# EAGLE board 8MIC_ximpedance_J007901D (EAGLE 7.7.0)
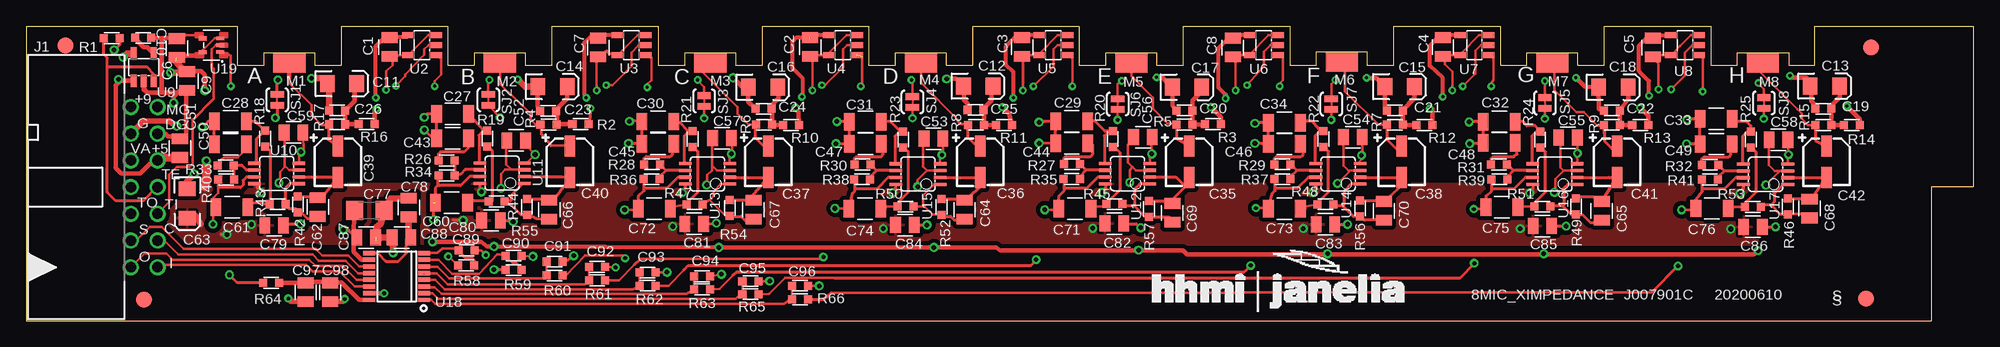
[diagram p0: board, top side]
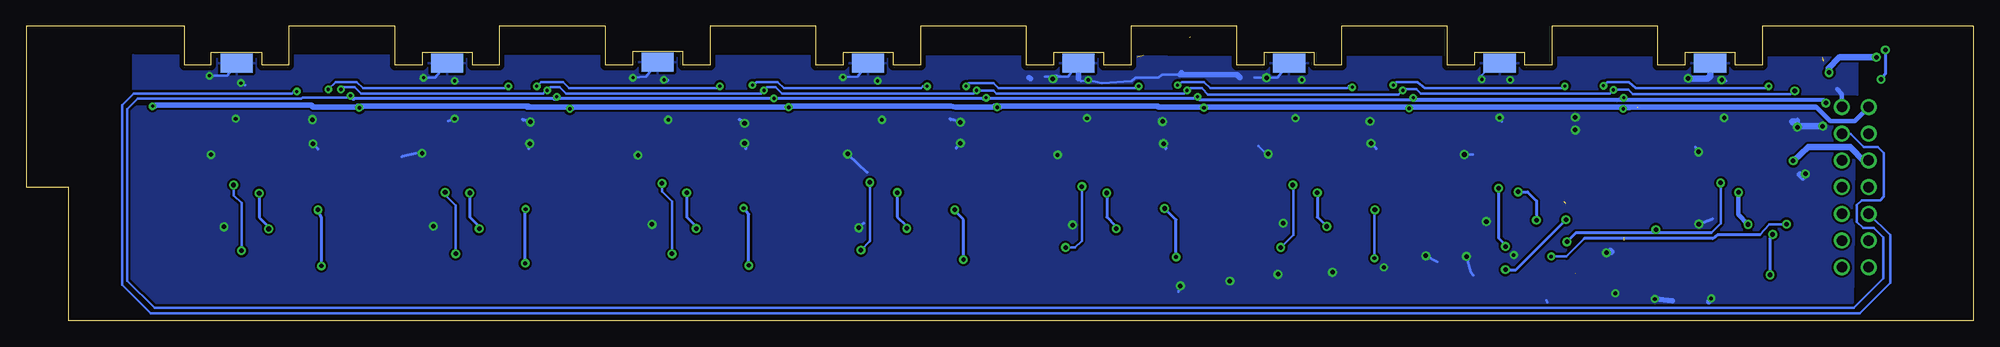
[diagram p1: board, bottom side, seen from below]

Size 185 x 28 mm. Coordinates in mm from the lower left corner, seen from the top.
Outline: 70 segments
Copper layers (1*16): Top 0.035mm / dielectric 1.5mm / Bottom 0.035mm
Design rules "default *": minimum track width 8mil, minimum drill 11mil, track to track 8mil, track to pad 8mil, pad to pad 8mil, via to via 8mil, smd to smd 8mil, copper to edge 20mil, drill to drill 8mil, minimum pad ring 10mil, minimum via ring 8mil, stop-mask expansion 4mil, vias tented up to drill 17mil, thermal gap 10mil

## Footprints (pad centres in the part's own frame; a part is rotated, then mirrored left to right if it is on the bottom)
0805S = smd 1.016 x 1.524: 1 -0.889,0; 2 0.889,0
0603S = smd 0.762 x 0.762: 1 -0.762,0; 2 0.762,0
EIA3216 = smd 1.4 x 1.6: A 1.4,0; C -1.4,0
1206S = smd 1.016 x 1.651: 1 -1.524,0; 2 1.524,0
CAP_ELEC_A = smd 1 x 2: M 0,-1.5; P 0,1.5
C1206 = smd 1.6 x 1.8: 1 -1.4,0; 2 1.4,0
PAK100/2500-5-14 = drill 1 pad 1.422: 1 -7.62,-1.27; 2 -7.62,1.27; 3 -5.08,-1.27; 4 -5.08,1.27; 5 -2.54,-1.27; 6 -2.54,1.27; 7 0,-1.27; 8 0,1.27; 9 2.54,-1.27; 10 2.54,1.27; 11 5.08,-1.27; 12 5.08,1.27; 13 7.62,-1.27; 14 7.62,1.27
FIDUCIAL-1.5X3 = smd 1.5 x 1.5: 1 0,0
CUI_EDGE = smd 3.048 x 1.778: + 0,-1.016 | smd 3.048 x 1.778 bottom: - 0,-1.016
SJ_2S-TRACE = smd 0.635 x 1.27: 1 -0.508,0; 2 0.508,0
SOT23-5 = smd 0.55 x 1.2: 1 -0.95,-1.3; 2 0,-1.3; 3 0.95,-1.3; 4 0.95,1.3; 5 -0.95,1.3
MSOP08 = smd 0.3 x 1.2: 1 -0.976,-2.113; 2 -0.326,-2.113; 3 0.324,-2.113; 4 0.974,-2.113; 5 0.974,2.112; 6 0.324,2.112; 7 -0.326,2.112; 8 -0.976,2.112
SSOP16 = smd 0.419 x 1.143: 1 -2.223,-2.6; 2 -1.587,-2.6; 3 -0.953,-2.6; 4 -0.318,-2.6; 5 0.318,-2.6; 6 0.953,-2.6; 7 1.587,-2.6; 8 2.223,-2.6; 9 2.223,2.6; 10 1.587,2.6; 11 0.953,2.6; 12 0.318,2.6; 13 -0.318,2.6; 14 -0.953,2.6; 15 -1.587,2.6; 16 -2.223,2.6
SOT-SC-5 = smd 0.35 x 0.75: 1 -0.65,-0.825; 3 0.65,-0.825 | smd 0.4 x 0.75: 2 0,-0.825; 4 0.65,0.825; 5 -0.65,0.825

## Placement (x,y rotation side)
C1  0.1  [0805S]  34.51,26.02 90 top
C2  0.1  [0805S]  74.49,26.02 90 top
C3  0.1  [0805S]  94.62,26.02 90 top
C4  0.1  [0805S]  134.61,26.02 90 top
C5  0.1  [0805S]  154.54,25.97 90 top
C6  0.1  [0805S]  14.31,25.92 90 top
C7  0.1  [0805S]  54.34,25.97 90 top
C8  0.1  [0805S]  114.64,25.97 90 top
C9  10  [0805S]  15.3,22.8 270 top
C10  0.01 NPO  [0603S]  11.1,26.9 0 top
C11  47  [EIA3216]  30,22.55 0 top
C12  47  [EIA3216]  90.45,22.3 0 top
C13  47  [EIA3216]  170.9,22.3 0 top
C14  47  [EIA3216]  50,22.25 0 top
C15  47  [EIA3216]  130.5,22.25 0 top
C16  47  [EIA3216]  70,22.2 0 top
C17  47  [EIA3216]  110.3,22.2 0 top
C18  47  [EIA3216]  150.8,22.2 0 top
C19  0.01 NPO  [0603S]  170.75,20.15 180 top
C20  0.01 NPO  [0603S]  110.05,20 180 top
C21  0.01 NPO  [0603S]  130.05,20 180 top
C22  0.01 NPO  [0603S]  150.65,20 180 top
C23  0.01 NPO  [0603S]  49.6,19.95 180 top
C24  0.01 NPO  [0603S]  70.05,20.15 180 top
C25  0.01 NPO  [0603S]  90.2,20.05 180 top
C26  0.01 NPO  [0603S]  29.55,20 180 top
C27  1200pF  [1206S]  40.51,19.65 0 top
C28  1200pF  [1206S]  19.4,18.97 0 top
C29  1200pF  [1206S]  99.34,18.95 0 top
C30  1200pF  [1206S]  60.02,18.93 0 top
C31  1200pF  [1206S]  79.73,18.91 0 top
C32  1200pF  [1206S]  139.96,18.91 0 top
C33  1200pF  [1206S]  160.57,19.19 0 top
C34  1200pF  [1206S]  119.55,18.83 0 top
C35  10  [CAP_ELEC_A]  110.5,15.1 0 top
C36  10  [CAP_ELEC_A]  90.65,15.1 0 top
C37  10  [CAP_ELEC_A]  70.5,15.1 0 top
C38  10  [CAP_ELEC_A]  130.7,15.1 0 top
C39  10  [CAP_ELEC_A]  29.6,15.1 0 top
C40  10uF  [CAP_ELEC_A]  51.65,15.1 0 top
C41  10  [CAP_ELEC_A]  151.15,15.1 0 top
C42  10  [CAP_ELEC_A]  171.05,15.1 0 top
C43  0.22  [1206S]  40.51,17.35 0 top
C44  0.22  [1206S]  99.34,16.85 0 top
C45  0.22  [1206S]  60.02,16.83 0 top
C46  0.22  [1206S]  119.55,16.83 0 top
C47  0.22  [1206S]  79.73,16.81 0 top
C48  0.22  [1206S]  139.96,16.91 0 top
C49  0.22  [1206S]  160.57,16.79 0 top
C50  0.22  [1206S]  19.4,16.77 0 top
C51  10  [0805S]  14.6,16.4 90 top
C52  0.047  [0805S]  46.55,17.15 180 top
C53  0.047  [0805S]  86.2,17.3 180 top
C54  0.047  [0805S]  126.05,17.45 180 top
C55  0.047  [0805S]  146.5,17.4 180 top
C56  0.047  [0805S]  106.1,17.45 180 top
C57  0.047  [0805S]  66.1,17.35 180 top
C58  0.047  [0805S]  166.5,17.2 180 top
C59  0.047  [0805S]  25.4,17.9 180 top
C60  1200pF  [1206S]  40.41,11.23 0 top
C61  1200pF  [1206S]  19.55,10.8 0 top
C62  330p NPO  [0805S]  27.7,10.8 90 top
C63  47  [EIA3216]  15.3,11.15 270 top
C64  330p NPO  [0805S]  89.15,10.55 90 top
C65  330p NPO  [0805S]  149.7,10.45 90 top
C66  330p NPO  [0805S]  49.7,10.55 90 top
C67  330p NPO  [0805S]  69.1,10.55 90 top
C68  330p NPO  [0805S]  169.45,10.65 90 top
C69  330p NPO  [0805S]  108.9,10.25 90 top
C70  330p NPO  [0805S]  129,10.45 90 top
C71  1200pF  [1206S]  99.64,10.63 0 top
C72  1200pF  [1206S]  59.67,10.66 0 top
C73  1200pF  [1206S]  119.55,10.66 0 top
C74  1200pF  [1206S]  79.68,10.64 0 top
C75  1200pF  [1206S]  140.21,10.79 0 top
C76  1200pF  [1206S]  160.17,10.67 0 top
C77  0.22  [C1206]  32.6,10.5 0 top
C78  10  [0805S]  36.35,10.75 90 top
C79  0.047  [0805S]  23.55,9.05 180 top
C80  0.047  [0805S]  44.16,9.53 180 top
C81  0.047  [0805S]  63.47,9.21 180 top
C82  0.047  [0805S]  103.39,9.23 180 top
C83  0.047  [0805S]  123.45,9.16 180 top
C84  0.047  [0805S]  83.48,9.09 180 top
C85  0.047  [0805S]  144.06,8.99 180 top
C86  0.047  [0805S]  164.07,8.92 180 top
C87  0.1  [0805S]  32.3,7.9 0 top
C88  0.1  [0805S]  35.65,7.9 180 top
C89  DNI  [0603S]  41.84,6.68 0 top
C90  DNI  [0603S]  46.3,6.17 0 top
C91  DNI  [0603S]  50.18,5.61 0 top
C92  DNI  [0603S]  54.23,5.1 0 top
C93  DNI  [0603S]  59.05,4.57 0 top
C94  DNI  [0603S]  64.2,4.21 0 top
C95  DNI  [0603S]  68.8,3.76 0 top
C96  DNI  [0603S]  73.51,3.32 0 top
C97  10  [0805S]  26.55,2.7 270 top
C98  0.1  [0805S]  28.88,2.7 270 top
J1  2514-5  [PAK100/2500-5-14]  11.2,12.7 90 top
JP1  FIDUCIAL1.5X3  [FIDUCIAL-1.5X3]  11.2,2 0 top
JP2  FIDUCIAL1.5X3  [FIDUCIAL-1.5X3]  174.8,2.1 0 top
JP3  FIDUCIAL1.5X3  [FIDUCIAL-1.5X3]  3.7,26.2 0 top
JP4  FIDUCIAL1.5X3  [FIDUCIAL-1.5X3]  175.3,26 0 top
M1  MIC-CUI  [CUI_EDGE]  25,25.5 0 top
M2  MIC-CUI  [CUI_EDGE]  45,25.5 0 top
M3  MIC-CUI  [CUI_EDGE]  65,25.5 0 top
M4  MIC-CUI  [CUI_EDGE]  85,25.5 0 top
M5  MIC-CUI  [CUI_EDGE]  105,25.5 0 top
M6  MIC-CUI  [CUI_EDGE]  125,25.6 0 top
M7  MIC-CUI  [CUI_EDGE]  145,25.5 0 top
M8  MIC-CUI  [CUI_EDGE]  165,25.5 0 top
R1  49K9  [0603S]  8.1,26.87 180 top
R2  499  [0603S]  52.65,18.7 0 top
R3  499  [0603S]  112.75,18.7 0 top
R4  4K02  [0603S]  49.61,18.65 0 top
R5  4K02  [0603S]  110.04,18.65 0 top
R6  4K02  [0603S]  70.12,18.63 0 top
R7  4K02  [0603S]  130.05,18.63 0 top
R8  4K02  [0603S]  90.23,18.61 0 top
R9  4K02  [0603S]  150.66,18.61 0 top
R10  499  [0603S]  72.65,18.6 0 top
R11  499  [0603S]  92.9,18.6 0 top
R12  499  [0603S]  132.85,18.6 0 top
R13  499  [0603S]  153.35,18.6 0 top
R14  499  [0603S]  173.45,18.6 0 top
R15  4K02  [0603S]  170.77,18.59 0 top
R16  499  [0603S]  32.35,18.7 0 top
R17  4K02  [0603S]  29.55,18.67 0 top
R18  49K9  [0603S]  22.7,17.3 270 top
R19  49K9  [0603S]  43.81,17.33 270 top
R20  49K9  [0603S]  103.24,17.28 270 top
R21  49K9  [0603S]  63.32,17.26 270 top
R22  49K9  [0603S]  123.25,17.26 270 top
R23  49K9  [0603S]  83.33,17.24 270 top
R24  49K9  [0603S]  143.86,17.24 270 top
R25  49K9  [0603S]  163.87,17.22 270 top
R26  49K9  [0603S]  39.95,15.23 180 top
R27  49K9  [0603S]  99.37,14.88 180 top
R28  49K9  [0603S]  59.45,14.86 180 top
R29  49K9  [0603S]  119.38,14.86 180 top
R30  49K9  [0603S]  79.46,14.84 180 top
R31  49K9  [0603S]  139.94,14.84 180 top
R32  49K9  [0603S]  160,14.82 180 top
R33  49K9  [0603S]  18.96,14.75 180 top
R34  29K4  [0603S]  39.95,13.8 0 top
R35  29K4  [0603S]  99.34,13.48 0 top
R36  29K4  [0603S]  59.42,13.46 0 top
R37  29K4  [0603S]  119.35,13.46 0 top
R38  29K4  [0603S]  79.43,13.44 0 top
R39  29K4  [0603S]  139.96,13.44 0 top
R40  29K4  [0603S]  18.98,13.43 0 top
R41  29K4  [0603S]  159.97,13.42 0 top
R42  133K  [0603S]  25.8,11.05 90 top
R43  49K9  [0603S]  23.9,11.07 0 top
R44  49K9  [0603S]  44.71,11.33 0 top
R45  49K9  [0603S]  103.39,11.08 0 top
R46  133K  [0603S]  167.38,10.87 90 top
R47  49K9  [0603S]  63.52,11.06 0 top
R48  49K9  [0603S]  123.45,11.06 0 top
R49  133K  [0603S]  147.26,10.86 90 top
R50  49K9  [0603S]  83.53,10.84 0 top
R51  49K9  [0603S]  144.06,10.84 0 top
R52  133K  [0603S]  86.96,10.83 90 top
R53  49K9  [0603S]  164.07,10.82 0 top
R54  133K  [0603S]  66.84,10.72 90 top
R55  133K  [0603S]  47.57,10.81 90 top
R56  133K  [0603S]  126.74,10.65 90 top
R57  133K  [0603S]  106.67,10.64 90 top
R58  0  [0603S]  41.8,5.25 180 top
R59  0  [0603S]  46.3,4.81 180 top
R60  0  [0603S]  50.18,4.29 0 top
R61  0  [0603S]  54.23,3.83 0 top
R62  0  [0603S]  59.05,3.33 0 top
R63  0  [0603S]  64.2,2.97 0 top
R64  10R0  [0603S]  23.25,3.6 180 top
R65  0  [0603S]  68.8,2.51 0 top
R66  0  [0603S]  73.51,2.02 0 top
SJ1  SOLDERJUMPERTRACE  [SJ_2S-TRACE]  23.85,21 90 top
SJ2  SOLDERJUMPERTRACE  [SJ_2S-TRACE]  43.9,21 270 top
SJ3  SOLDERJUMPERTRACE  [SJ_2S-TRACE]  64.4,20.9 270 top
SJ4  SOLDERJUMPERTRACE  [SJ_2S-TRACE]  84.2,20.8 270 top
SJ5  SOLDERJUMPERTRACE  [SJ_2S-TRACE]  144.3,20.7 270 top
SJ6  SOLDERJUMPERTRACE  [SJ_2S-TRACE]  103.7,20.6 270 top
SJ7  SOLDERJUMPERTRACE  [SJ_2S-TRACE]  124,20.6 270 top
SJ8  SOLDERJUMPERTRACE  [SJ_2S-TRACE]  165.1,20.7 270 top
U2  TMP05  [SOT23-5]  37.6,26.2 90 top
U3  TMP05  [SOT23-5]  57.5,26.2 90 top
U4  TMP05  [SOT23-5]  77.6,26.2 90 top
U5  TMP05  [SOT23-5]  97.6,26.2 90 top
U6  TMP05  [SOT23-5]  117.6,26.2 90 top
U7  TMP05  [SOT23-5]  137.6,26.2 90 top
U8  TMP05  [SOT23-5]  157.6,26.2 90 top
U9  LP3985  [SOT23-5]  11.15,24.1 0 top
U10  OPA2376  [MSOP08]  23.8,14 90 top
U11  OPA2376  [MSOP08]  45.21,14.03 90 top
U12  OPA2376  [MSOP08]  104.64,13.98 90 top
U13  OPA2376  [MSOP08]  64.72,13.96 90 top
U14  OPA2376  [MSOP08]  124.65,13.96 90 top
U15  OPA2376  [MSOP08]  84.73,13.94 90 top
U16  OPA2376  [MSOP08]  145.26,13.94 90 top
U17  OPA2376  [MSOP08]  165.27,13.92 90 top
U18  LTC1867L  [SSOP16]  35.2,4.2 90 top
U19  TMP05/06  [SOT-SC-5]  17.6,26.2 90 top
U$1  JFRC-LOGOLOGO_OP  [LOGO_BMP_OP]  117.14,2.29 0 top

## Library data of the parts
C1-C10 C19-C62 C64-C76 C78-C98 M1-M8 R1-R66 U19 U$1 = STEVES_BU
C11-C18 C63 JP1-JP4 SJ1-SJ8 = SparkFun
C77 = eagle-ltspice; SPICEMODEL: NONE; SPICEPREFIX: C
J1 = con-3m; MPN: N2514-5002RB; OC_FARNELL: 1788673; OC_NEWARK: 97K6709
U2-U8 = analog-devices_sws
U9 = jfrc
U10-U17 = burr-brown; MF: TEXAS INSTRUMENTS; MPN: OPA2237EA/250; OC_FARNELL: 1470365; OC_NEWARK: 35C1853
U18 = linear-technology

## Nets
1.25V: C52.2 C53.2 C54.2 C55.2 C56.2 C57.2 C58.2 C59.2 C77.1 C87.1 U10.3 U11.3 U12.3 U13.3 U14.3 U15.3 U16.3 U17.3 U18.10
2.5V: C78.1 C88.1 U18.9
!CS: J1.4 U18.11
+3V3D: C1.1 C2.1 C3.1 C4.1 C5.1 C6.1 C7.1 C8.1 C9.1 U2.3 U2.5 U3.3 U3.5 U4.3 U4.5 U5.3 U5.5 U6.3 U6.5 U7.3 U7.5 U8.3 U8.5 U9.5 U19.3 U19.5
+5VD: C51.1 J1.9 R1.1 U9.1
+VA: C63.A C79.2 C80.2 C81.2 C82.2 C83.2 C84.2 C85.2 C86.2 J1.10 R64.2 U10.8 U11.8 U12.8 U13.8 U14.8 U15.8 U16.8 U17.8
+VM: J1.14 R2.2 R3.2 R10.2 R11.2 R12.2 R13.2 R14.2 R16.2
CLK: J1.3 U18.12
DGND: C1.2 C2.2 C3.2 C4.2 C5.2 C6.2 C7.2 C8.2 C9.2 C10.2 C51.2 J1.11 U2.4 U3.4 U4.4 U5.4 U6.4 U7.4 U8.4 U9.2 U19.4
GND: C27.1 C28.1 C29.1 C30.1 C31.1 C32.1 C33.1 C34.1 C43.1 C44.1 C45.1 C46.1 C47.1 C48.1 C49.1 C50.1 C52.1 C53.1 C54.1 C55.1 C56.1 C57.1 C58.1 C59.1 C63.C C77.2 C78.2 C79.1 C80.1 C81.1 C82.1 C83.1 C84.1 C85.1 C86.1 C87.2 C88.2 C89.2 C90.2 C91.2 C92.2 C93.2 C94.2 C95.2 C96.2 C97.2 C98.2 J1.12 SJ1.1 SJ2.2 SJ3.2 SJ4.2 SJ5.2 SJ6.2 SJ7.2 SJ8.2 U10.4 U11.4 U12.4 U13.4 U14.4 U15.4 U16.4 U17.4 U18.15
M1: C61.1 R40.1 R58.2 U10.7
M2: C60.1 R34.1 R59.2 U11.7
M3: C72.1 R36.1 R60.2 U13.7
M4: C74.1 R38.1 R61.2 U15.7
M5: C71.1 R35.1 R62.2 U12.7
M6: C73.1 R37.1 R63.2 U14.7
M7: C75.1 R39.1 R65.2 U16.7
M8: C76.1 R41.1 R66.2 U17.7
MGND: C11.C C12.C C13.C C14.C C15.C C16.C C17.C C18.C C19.2 C20.2 C21.2 C22.2 C23.2 C24.2 C25.2 C26.2 J1.13 M1.- M2.- M3.- M4.- M5.- M6.- M7.- M8.- SJ1.2 SJ2.1 SJ3.1 SJ4.1 SJ5.1 SJ6.1 SJ7.1 SJ8.1
MIC4: C36.P M4.+ R8.1
MISO: J1.2 U18.13
MOSI: J1.1 U18.14
N$1: C39.P M1.+ R17.1
N$2: C39.M C62.2 R42.2 U10.2
N$3: C40.P M2.+ R4.1
N$4: C14.A C23.1 R2.1 R4.2
N$5: C40.M C66.2 R55.2 U11.2
N$6: C62.1 R42.1 R43.2 U10.1
N$7: C11.A C26.1 R16.1 R17.2
N$8: C16.A C24.1 R6.2 R10.1
N$9: C61.2 R18.2 R43.1
N$10: C28.2 R18.1 U10.5
N$11: C17.A C20.1 R3.1 R5.2
N$12: C50.2 R33.2
N$13: R33.1 R40.2 U10.6
N$14: C66.1 R44.2 R55.1 U11.1
N$15: C60.2 R19.2 R44.1
N$16: C27.2 R19.1 U11.5
N$17: C43.2 R26.2
N$18: R26.1 R34.2 U11.6
N$19: C37.P M3.+ R6.1
N$20: C12.A C25.1 R8.2 R11.1
N$21: C37.M C67.2 R54.2 U13.2
N$23: C67.1 R47.2 R54.1 U13.1
N$24: C72.2 R21.2 R47.1
N$25: C30.2 R21.1 U13.5
N$26: C45.2 R28.2
N$27: R28.1 R36.2 U13.6
N$28: C15.A C21.1 R7.2 R12.1
N$29: C18.A C22.1 R9.2 R13.1
N$30: C36.M C64.2 R52.2 U15.2
N$31: C13.A C19.1 R14.1 R15.2
N$32: C64.1 R50.2 R52.1 U15.1
N$33: C74.2 R23.2 R50.1
N$34: C31.2 R23.1 U15.5
N$35: C47.2 R30.2
N$36: R30.1 R38.2 U15.6
N$39: C35.M C69.2 R57.2 U12.2
N$41: C69.1 R45.2 R57.1 U12.1
N$42: C71.2 R20.2 R45.1
N$43: C29.2 R20.1 U12.5
N$44: C44.2 R27.2
N$45: R27.1 R35.2 U12.6
N$46: C38.P M6.+ R7.1
N$48: C38.M C70.2 R56.2 U14.2
N$50: C70.1 R48.2 R56.1 U14.1
N$51: C73.2 R22.2 R48.1
N$52: C34.2 R22.1 U14.5
N$53: C46.2 R29.2
N$54: R29.1 R37.2 U14.6
N$55: C41.P M7.+ R9.1
N$57: C41.M C65.2 R49.2 U16.2
N$59: C65.1 R49.1 R51.2 U16.1
N$60: C75.2 R24.2 R51.1
N$61: C32.2 R24.1 U16.5
N$62: C48.2 R31.2
N$63: R31.1 R39.2 U16.6
N$64: C42.P M8.+ R15.1
N$66: C42.M C68.2 R46.2 U17.2
N$68: C68.1 R46.1 R53.2 U17.1
N$69: C76.2 R25.2 R53.1
N$70: C33.2 R25.1 U17.5
N$71: C49.2 R32.2
N$72: R32.1 R41.2 U17.6
N$75: U2.2 U19.1
N$76: U2.1 U3.2
N$77: U3.1 U4.2
N$78: U4.1 U5.2
N$79: U5.1 U6.2
N$80: U6.1 U7.2
N$81: U7.1 U8.2
N$84: C10.1 U9.4
N$90: C35.P M5.+ R5.1
OUT1: C89.1 R58.1 U18.8
OUT2: C90.1 R59.1 U18.7
OUT3: C91.1 R60.1 U18.6
OUT4: C92.1 R61.1 U18.5
OUT5: C93.1 R62.1 U18.4
OUT6: C94.1 R63.1 U18.3
OUT7: C95.1 R65.1 U18.2
OUT8: C96.1 R66.1 U18.1
TEN: J1.7 R1.2 U9.3
TMI: J1.5 U19.2
TMO: J1.6 U8.1
VADC: C97.1 C98.1 R64.1 U18.16

## Tracks (layer width: path | path; a pad name or v marks a point on that pad's centre or on a via)
1.25V  (via drill 0.43)
  Top 0.254: U10.3 24.98,14.32 24.55,14.75 | 24.55,14.75 24.55,17.19 C59.2 | 24.55,14.75 24.55,14.6 24.1,14.15 24.1,13.2 v24,13.1 | C52.2 45.6,17.24 45.6,14.85 46.1,14.35 U11.3 45.5,14.35 45.1,13.95 v45.1,12.6 | U13.3 65.62,14.28 65.15,14.75 | 65.15,14.75 65.15,17.59 C57.2 | 65.15,14.75 65.15,14.3 64.7,13.85 64.7,12.95 v64.65,12.9 | U15.3 85.59,14.26 | 85.59,14.26 85.2,14.65 85.2,17.29 C53.2 | v84.7,12.75 84.7,13.38 85.59,14.26 | C56.2 105.26,17.31 104.7,16.75 104.7,15.05 105.12,14.62 | 105.12,14.62 105.45,14.3 U12.3 | v104.85,13.15 104.85,14.35 105.12,14.62 | C54.2 125.16,14.74 125.65,14.3 126.75,14.3 U14.3 125.83,14.28 v124.6,13.05 | v123.65,6.35 123.65,6.3 | C55.2 145.75,18.06 145.75,14.55 146.04,14.26 U16.3 146.11,14.26 145.3,13.45 145.3,12.3 v145.2,12.2 | v144.2,6.35 144.15,6.3 | C58.2 165.6,17.59 165.6,14.8 166.16,14.24 U17.3 166.64,14.24 v165.3,12.9 | v164.55,6.65 164.15,6.3
  Top 0.305: C87.1 30.65,8.6 v30.15,8.65 | 151.3,6.3 151.35,6.3
  Top 0.406: 151.3,6.3 144.15,6.3 123.65,6.3 110.3,6.3 109.9,6.7 v105.69,6.7 92.5,6.7 92.15,6.95 v86.25,6.95 v65.8,6.95 v44.45,7.05 43.8,7.05 43.2,7.5 v38.6,7.5 | 151.35,6.3 164.15,6.3 164.6,6.75 | U18.10 31.86,5.79 31.1,6.55 31.1,7.89 C87.1 31.11,8.75 C77.1
  Bottom 0.254: v24,13.1 24,9.25 24.9,8.35 | v45.1,12.6 44.95,12.6 | v64.65,12.9 64.6,12.9 64.6,8.15 v65.8,6.95 | v105.69,6.7 104.89,7.54 104.85,7.6 v104.85,13.15 | v86.25,6.95 85.35,6.95 84.7,7.6 v84.7,12.75 | v124.6,13.05 124.6,12.3 123.65,11.35 v123.65,6.35 | v145.2,12.2 145.2,11.95 144.2,10.95 v144.2,6.35 | v165.3,12.9 165.3,11.9 164.55,11.2 v164.55,6.65
  Bottom 0.305: v44.45,7.05 44.45,7.2 45.05,7.8 45.05,12.55 v45.1,12.6 | 24.9,8.35 30.15,8.35 | 30.15,8.35 37.75,8.35 v38.6,7.5 | v30.15,8.65 30.15,8.35
2.5V
  Top 0.305: U18.9 33.38,6.42 34.15,5.65 35.35,5.65 36.1,6.4 36.15,7.81 C88.1
  Top 0.406: 36.3,7.81 C88.1
  Top 0.61: C78.1 36.35,8.01 C88.1
!CS
  Top 0.254: U18.11 31.65,5.15 30.6,6.2 28.1,6.2 27.5,6.8 14.95,6.8 12.85,8.9 11.71,8.9 10.5,7.7 10.4,7.62 J1.4
+3V3D  (via drill 0.3, 0.43)  (1 unrouted)
  Top 0.25: v54.2,21.9 54.2,24.7 54.54,25.06 C7.1 55.14,25.66 55.4,25.4 56.15,25.4 U3.5 58.1,27.15 U3.3 | v34.19,21.94 34.19,23.71 34.8,24.3 34.8,25.1 34.9,25.5 C1.1 | v74.7,21.9 74.7,24.55 74.65,25.2 C2.1 75.1,25.25 U4.5 76.25,25.45 77.95,27.15 U4.3 | v94.7,21.9 94.7,25.24 C3.1 95.03,25.25 U5.5 96.3,25.45 98,27.15 U5.3 | v114.9,21.9 114.9,24.6 115,24.8 114.85,25.32 C8.1 114.95,25.25 U6.5 116.3,25.4 118.05,27.15 U6.3 | v135.5,21.9 135.5,23.7 134.8,24.4 134.8,25.5 C4.1 135.37,25.25 U7.5 136.35,25.45 138.05,27.15 U7.3 | v155.1,22 155.1,24.5 155,24.6 154.8,25.3 C5.1 155.4,25.25 U8.5 157.1,26.1 158.15,27.15 U8.3
  Top 0.254: C1.1 35.29,25.21 U2.5 38.2,27.15 U2.3 | U19.3 17.9,26.85 16.77,25.73 U19.5 16.55,25.55 16.22,25.23
  Top 0.305: 15.9,23.8 14.99,23.8 C9.1
  Top 0.406: 16.1,25.25 16.22,25.23 14.51,25.23 C6.1 | 14.99,23.8 14.99,23.94 | v16.95,21.85 16.95,23.4 16.6,23.75 15.61,23.75 C9.1 15.09,23.9
  Top 0.61: 15.09,23.9 15,23.9 14.93,23.82 | 14.93,23.82 14.2,24.7 | U9.5 9.55,25.4 v9.2,25.05 | v13.7,23.6 14.65,23.6 14.93,23.82
  Bottom 0.25: v34.19,21.94 34.53,21.6 52.5,21.6 52.9,22 54,22 v54.2,21.9 54.6,21.5 72.7,21.5 73.3,22.1 74.4,22.1 v74.7,21.9 75,21.6 92.8,21.6 93.1,21.9 v94.7,21.9 95,21.6 113.2,21.6 113.8,22.2 114.6,22.2 v114.9,21.9 115.2,21.6 133.7,21.6 134.3,22.2 135.2,22.2 135.5,22 | 135.5,22 135.7,21.9 | 135.5,22 135.7,22 135.44,21.95 | 135.44,21.95 v135.5,21.9 | 135.44,21.95 135.54,21.95 135.9,21.6 153.2,21.6 153.8,22.2 154.9,22.2 v155.1,22
  Bottom 0.254: v34.19,21.94 33.95,21.98 32.78,21.98 32.34,21.54 17.36,21.54 v16.95,21.85
  Bottom 0.61: v9.2,25.05 12.65,25.05 12.75,25 13.7,24 v13.7,23.6
+5VD  (via drill 0.43)
  Top 0.305: R1.1 8.86,26.26 v8.35,25.75 | v8.75,22.95 8.95,22.85
  Top 0.406: J1.9 12.04,15.24 10.8,14 9,14 8.5,14.5 8.5,22.4 8.95,22.85 10.15,22.85 U9.1
  Top 0.61: 10.15,22.75 U9.1
  Top 0.813: J1.9 12.78,15.49 C51.1
  Bottom 0.305: v8.35,25.75 8.35,23.45 v8.75,22.95
+VA  (via drill 0.43)
  Top 0.305: U13.8 62.61,12.65 v62.32,12.16 | v61.42,8.96 61.42,9.06 | U15.8 82.62,12.63 v82.33,12.14 | v81.43,8.74 81.43,9.14 | U17.8 163.16,12.61 v162.87,12.12 | v161.97,8.72 161.97,9.02 | U16.8 143.15,12.63 v142.86,12.14 | v141.96,8.74 141.96,9.04 | U14.8 122.54,12.65 v122.25,12.16 | v121.35,8.76 121.35,9.06 | U12.8 102.53,12.67 v102.24,12.18 | v101.34,8.78 101.34,9.08 | U10.8 21.99,12.91 | U11.8 43.1,12.55 v43.25,12.25 | v41.5,9.55 40.7,9.55 40.55,9.6 | R64.2 20.05,3.6 v19.3,4.35 | v19.05,8.2 18.55,8.15 18.5,8.2
  Top 0.406: 21.99,12.91 22,12.9 21.99,12.69 v22.3,12.2
  Top 0.61: 16.05,10 16.55,9.2
  Top 0.813: v17.1,15.2 17.1,13 16.95,12.7
  Bottom 0.305: v62.32,12.16 62.32,9.86 61.52,9.06 61.52,8.86 v61.42,8.96 | v82.33,12.14 82.33,9.84 81.53,9.04 81.53,8.84 v81.43,8.74 | v162.87,12.12 162.87,9.82 162.07,9.02 162.07,8.82 v161.97,8.72 | v142.86,12.14 142.86,9.84 142.06,9.04 142.06,8.84 v141.96,8.74 | v122.25,12.16 122.25,9.86 121.45,9.06 121.45,8.86 v121.35,8.76 | v102.24,12.18 102.24,9.88 101.44,9.08 101.44,8.88 v101.34,8.78 | v43.25,12.25 42.35,12.25 41.5,11.4 v41.5,9.55 | v19.3,4.35 19.3,7.8 v19.05,8.2
  Bottom 0.406: v22.3,12.2 22.3,10.1 v21.4,9.15
  Bottom 0.61: v17.1,15.2 15.65,16.51 11.69,16.51 10.35,15.15 10.35,15.24 J1.10
  pour Top (isolate 0.4): -0.83,13 164.55,13 164.55,7.2 -0.75,7.35
+VM  (via drill 0.3, 0.35)  (1 unrouted)
  Top 0.25: v173,20.4 172.95,20.45 173.05,20.45
  Top 0.254: 92.79,20.46 v92.75,20.3 | 112.45,20.15 v112.55,20.3 | 133.27,19.98 v133.35,20.15 | 153.29,20.16 v153.35,20.25 | 73.07,20.08 v73.1,20.25
  Top 0.305: R2.2 53.61,19.41 v53.6,20.2
  Top 0.406: R16.2 33.1,19.8 33.1,20 33.09,19.96 v33.25,20.15 | 73.07,20.08 73.37,19.84 R10.2 | R11.2 93.36,19.69 v92.75,20.3 | R3.2 113.51,19.34 v112.55,20.3 | R12.2 133.61,20.11 v133.35,20.15 | R13.2 154.11,19.49 v153.35,20.25 | R14.2 174.21,19.19 v173,20.4
  Bottom 0.25: 31.9,20.3 35.3,20.3 | 51.7,20.3 51.7,20.2 v53.6,20.2 | 58.3,20.3 56.9,20.3
  Bottom 0.254: 118.2,20.3 122.1,20.4 | v92.75,20.3 92.65,20.4 | v112.55,20.3 112.35,20.35 | v153.35,20.25 153.3,20.3 | v73.1,20.25 73.1,20.1
  Bottom 0.406: 10.28,20.42 J1.14 11.25,19 13.6,19 14.95,20.35 15,20.3 | v33.25,20.15 31.9,20.25 31.7,20.25
  Bottom 0.5: v173,20.4 172.8,20.4 172.7,20.5 157.95,20.5 157.75,20.3 153.4,20.3 | 153.1,20.3 153.3,20.3 153.4,20.3 | 153.4,20.3 153.5,20.4 137.3,20.4 137.2,20.3 | 137.4,20.3 137.2,20.3 | 137.2,20.3 133.5,20.3 | 133.5,20.3 118.2,20.3 v112.55,20.3 112.45,20.3 | v133.35,20.15 133.1,20.2 133.5,20.3 | 112.45,20.3 112.35,20.35 | 112.45,20.3 112.2,20.4 97.2,20.4 96.7,20.3 93.2,20.3 | 92.65,20.4 92.5,20.3 v92.75,20.3 93.2,20.3 | 93.2,20.3 93,20.4 92.65,20.4 | 92.65,20.4 77.5,20.4 77.4,20.3 73.1,20.3 | 73.1,20.3 v73.1,20.25 | 73.1,20.3 58.3,20.3 51.7,20.3 31.9,20.3 15,20.3
CLK
  Top 0.254: U18.12 31.53,4.52 30.35,5.7 27.8,5.7 27.2,6.3 14.45,6.3 13.15,7.6 12.44,7.6 J1.3
DGND  (via drill 0.3, 0.43)  (1 unrouted)
  Top 0.254: 14.65,27.15 16.48,27.15 U19.4
  Top 0.4: C2.2 75.08,27.18 75.8,27.2 76.25,27.2 U4.4 | v33.2,21.2 33.2,26.1 34.3,27.2 34.94,27.2 C1.2 35.08,26.98 35.4,27 36.15,27 U2.4 | v53.2,21.2 53.05,21.5 53.05,26.45 53.7,27.1 54.46,27.1 C7.2 54.91,27.15 U3.4 | v73.7,21.3 73.8,21.6 73.8,23 72.8,24 72.8,26.55 73.2,26.95 74.37,26.95 | v93.8,21.2 93.8,23.65 93.1,24.3 93.1,26.1 94.1,27.1 94.7,27.1 C3.2 94.98,27.15 U5.4 | v113.95,21.15 113.95,21.5 113.3,22.15 113.3,25.9 114.3,26.9 115.02,26.9 C8.2 115.31,27.15 U6.4 | v134.6,21.3 134.6,23.1 133.35,24.25 133.35,26.15 134.2,27 134.78,27 C4.2 135.12,27.15 U7.4 | v154.2,21.4 154.2,22.8 153.25,23.75 153.25,26.15 154.1,27 154.77,27 C5.2 155.01,27.1 156.2,27.1 U8.4
  Top 0.406: J1.11 13.22,17.78 13.5,17.5 14.39,17.5 C51.2 14.79,17.29 15.2,17.7 15.2,21.41 15.14,21.91 | 15.14,21.91 C9.2 | 15,22 15.14,21.91 | 14.65,27.15 C6.2 14.27,26.85 C10.2 13,26.85 12.85,26.8 12.85,21.75 13.2,21.7 | v14,20.7 14,21.3 14.55,21.85 14.75,21.85 | 14.75,21.85 15.1,21.85 15.15,21.9 | 13.2,21.7 11.5,21.7 11.15,22.05 U9.2 11.15,21.95 | 13.2,21.7 14.6,21.7 14.75,21.85
  Bottom 0.254: v154.2,21.4 154.5,21.2 158.75,21.2 158.9,21.1 174.4,21.1 175.4,20.1 175.4,3.8 172.8,1.2 11.35,1.2 8.55,4 8.55,7.9 9.45,8.8 10.45,8.8 11.05,9.4 11.05,11 10.6,11.45 8.85,11.45 8.5,11.8 8.5,15.95 9.05,16.5 10.4,16.5 11.65,17.75 12.44,17.75 J1.11
  Bottom 0.3: 53.2,21 73.5,21 73.7,21.1 94,21.1 114.1,21.1 134.8,21.1 153.9,21.1
  Bottom 0.4: 14.1,20.9 14.2,21 33.9,21 | 33.9,21 v33.2,21.2 | 33.9,21 53.2,21 v53.2,21.2 | 73.7,21.1 v73.7,21.3 | 94,21.1 v93.8,21.2 | 114.1,21.1 v113.95,21.15 | 134.8,21.1 v134.6,21.3 | 153.9,21.1 v154.2,21.4
  Bottom 0.406: 14.1,20.9 14.2,20.9 v14,20.7
GND  (via drill 0.36, 0.4, 0.43)  (1 unrouted)
  Top 0.25: SJ2.2 v45,19.3 | SJ3.2 v64.4,19.25 | SJ4.2 v84.2,19.25 | SJ8.2 v165.1,19.2 | SJ5.2 v144.3,19.2 | SJ7.2 v124,19.1 | SJ6.2 v103.7,19.1
  Top 0.254: 87.17,14.95 U15.4 86.84,15.83 v87.01,15.76 87.09,16.25 C53.1 | U14.4 127.09,14.92 126.5,14.95 126.88,15.33 v126.88,15.73 126.94,15.95 C54.1 | U16.4 147.35,16 v147.39,15.91 147.39,16.61 C55.1 | U17.4 167.36,15.73 v167.45,15.79 167.44,16.59 C58.1 | C92.2 v56.01,5.05 | C93.2 v60.88,4.59 60.83,4.32 | C94.2 v66.06,4.41 | C95.2 v70.64,3.76 | 74.51,3.32 C96.2 74.34,3.29 v75.33,3.29 | C89.2 43.22,6.68 43.3,6.6 v43.66,6.23 | C90.2 47.88,6.12 v48.15,6.1 | C91.2 51.31,5.61 v52.01,6.16 | U10.4 25.91,15.76 v26.1,16.05 26.34,16.01 C59.1 | C52.1 47.39,16.76 v48.35,15.8 47.55,15 U11.4 | U13.4 66.83,15.68 v67,15.85 67.09,15.94 C57.1 | C56.1 106.94,16.59 v106.95,15.85 106.75,15.8 U12.4 | 33.99,2.61 v34,2.6
  Top 0.305: C50.1 C28.1 17.28,18.95 v16.7,18.4 | C79.1 24.65,9.15 24.87,9.18 v26.07,9.18 | v37.81,19.33 38.09,19.65 C27.1 C43.1 38.78,17.2 v37.81,18.13 | v57.32,18.96 57.35,19.03 C30.1 C45.1 57.49,16.83 v57.22,16.86 | C81.1 v65.57,9.26 | v77.03,18.94 77.16,18.91 C31.1 C47.1 77.5,16.81 v76.93,16.84 | C84.1 v85.58,9.09 | v96.24,18.88 96.27,18.95 C29.1 C44.1 97.41,16.85 v96.24,16.88 | C82.1 104.3,9.1 104.4,9.2 105.45,9.2 105.82,8.83 v105.89,8.83 | v116.75,18.76 116.98,18.83 C34.1 C46.1 117.42,16.83 v116.75,16.86 | C83.1 v125.55,9.16 | v137.11,18.89 137.19,18.91 C32.1 C48.1 138.03,16.81 138.15,16.81 138.15,16.85 v137.15,16.85 137.15,16.8 v137.16,16.84 | C85.1 v146.31,8.99 | v157.82,19.12 157.85,19.19 C33.1 C49.1 158.04,16.79 v157.77,16.82 | C86.1 v166.22,8.92 | SJ1.1 23.85,19.5 v23.65,19.3 | C80.1 46.16,9.53 v46.26,9.43
  Top 0.406: U18.15 33.99,2.61
  Top 0.5: 11.15,19 13.6,19 | C97.2 25.16,1.81 v24.9,2.1 | C98.2 30.09,1.84 v30.25,2.05
  Top 0.61: J1.12 11.15,19 | 13.6,19 v14.3,18.5 | C63.C 15.3,13.3 v15.95,13.95 | C87.2 C88.2 34.86,6.84 v34.85,6.45 | 33.2,7.65 33.24,7.64 33.25,8.85 33.65,9.2 C77.2 34.64,11.64 C78.2
  Bottom 0.25: v45,19.3 44.8,18.95 | v64.4,19.25 64.5,19.2 | v84.2,19.25 84.4,19.3 | v144.3,19.2 144.9,19 | v124,19.1 123.9,19.4 | v103.7,19.1 103.9,19.2 103.8,19.1
  Bottom 0.254: v52.01,6.16 50.93,5.59 | v60.88,4.59 60.83,4.7 | v66.06,4.41 65.79,4.19 | 70.46,3.81 v70.64,3.76 | v75.33,3.29 75.51,2.72 | v48.15,6.1 47.75,4.57 47.5,4.32 | 40.45,1.75 40.55,1.95 | v26.1,16.05 26.4,16.5 | v48.35,15.8 47.55,15.8 | v67,15.85 67.2,15.9 67.9,16.6 | v34,2.6 34,2.3
  Bottom 0.305: v16.7,18.4 16.7,19.2 16.6,19.1 | v26.07,9.18 24.77,9.68 | v37.81,19.33 37.81,19.23 37.71,19.13 | v46.26,9.43 46.26,9.33 | v57.32,18.96 57.32,19.16 57.22,19.06 | v57.22,16.86 56.72,16.36 | v65.57,9.26 65.52,9.26 | v77.03,18.94 77.33,19.14 77.23,19.04 | v76.93,16.84 76.73,16.34 | v85.58,9.09 85.53,9.24 | v96.24,18.88 97.24,19.18 97.14,19.08 | v96.24,16.88 96.64,16.38 | v105.89,8.83 105.44,9.28 | v116.75,18.76 117.25,19.16 117.15,19.06 | v116.75,16.86 116.65,16.36 | v125.55,9.16 125.45,9.26 | v137.11,18.89 137.86,19.14 137.76,19.04 | v137.16,16.84 137.26,16.34 | v146.31,8.99 146.31,8.89 | v157.82,19.12 157.87,19.12 157.77,19.02 | v157.77,16.82 157.27,16.32 | v166.22,8.92 166.07,9.22 | v106.95,15.85 105.1,14.1 | v23.65,19.3 23.5,19.3 23.4,19.2 | 148,15.9 149.3,15.6
  Bottom 0.5: v24.9,2.1 25.1,1.8 25.1,1.85 | v30.25,2.05 28.6,1.9
  Bottom 0.61: v14.3,18.5 16.64,18.5 17.2,18.96 16.74,18.96 v16.7,18.4 | v15.95,13.95 16.2,13.6 16.5,13.9 | v34.85,6.45 34.5,6.65 34.4,6.55
  pour Bottom: 12.65,20.15 11.25,20.2 11.35,11.05 11.35,9.1 11.45,1.1 11.45,-0.55 191.6,0.2 191.5,20.4
M1  (via drill 0.35, 0.43)
  Top 0.254: R40.1 18.22,12.85 18.22,12.13 17.8,11.71 17.8,10.72 | 17.8,10.72 C61.1 | 17.8,10.72 17.74,11.07 v17.74,9.17 | v40.1,6.1 40.88,5.4 R58.2
  Top 0.305: U10.7 20.92,13.67 20.6,13.35 20.6,12.9 20.35,12.65 18.32,12.65 18.22,12.85
  Bottom 0.254: v17.74,9.17 19.36,9.17 20.27,8.16 | 36.95,7.8 38.65,6.1 v40.1,6.1
  Bottom 0.305: 20.27,8.16 24.29,8.16 24.75,7.8 36.95,7.8
M2  (via drill 0.43)  (1 unrouted)
  Top 0.305: 38.6,11.82 C60.1 38.85,11.27 38.85,12.6 39.1,12.85 39.25,12.85 | U11.7 42.1,13.7 41.25,12.85 39.25,12.85 | R59.2 44.79,4.81 v44.45,4.85 | v38.7,9.6 38.68,11.15 | 39.25,12.85 39.15,12.95 39.15,13.76 R34.1
  Bottom 0.305: v44.45,4.85 43.45,4.85 v38.7,9.6
M3  (via drill 0.36, 0.43)
  Top 0.254: v56.85,10.54 58.28,10.54 C72.1 | 56.74,6.17 v56.9,5.94 | 56.9,6.09 v56.9,5.94 | R60.2 51.29,4.29 53.1,6.2 56.66,6.2 v56.9,5.94
  Top 0.305: C72.1 58.2,11.89 58.72,12.36 58.72,12.56 | 58.72,12.56 58.72,13.42 R36.1 | U13.7 61.89,13.63 60.82,12.56 58.72,12.56
  Bottom 0.254: v56.9,5.94 56.9,10.16 v56.85,10.54
M4  (via drill 0.4, 0.43)
  Top 0.254: 78.23,10.67 78.26,10.64 C74.1 78.38,10.67 v76.84,10.67 | R61.2 56.33,3.83 57.78,5.33
  Top 0.305: C74.1 78.51,12.12 78.73,12.34 78.73,12.54 | 78.73,12.54 78.73,13.4 R38.1 | U15.7 81.9,13.61 80.83,12.54 78.73,12.54 | 57.78,5.33 58.35,5.85 75.4,5.9 v75.75,6.05
  Bottom 0.305: v75.75,6.05 75.75,9.58 v76.84,10.67
M5  (via drill 0.4, 0.43)
  Top 0.254: R62.2 61.03,3.33 62.48,4.83 | v96.78,10.54 98.18,10.54 C71.1
  Top 0.305: C71.1 98.12,11.86 98.64,12.38 98.64,12.58 | 98.64,12.58 98.64,13.44 R35.1 | U12.7 101.81,13.65 100.74,12.58 98.64,12.58 | 62.48,4.83 62.9,5.25 95.45,5.25 v95.95,5.8
  Bottom 0.254: 96.79,10.46 v96.78,10.54
  Bottom 0.305: v95.95,5.8 95.95,9.61 96.79,10.46
M6  (via drill 0.35, 0.4)
  Top 0.254: v116.85,10.7 118.29,10.7 C73.1 | R63.2 65.86,3.02 67.16,4.32
  Top 0.305: C73.1 118.43,12.14 118.65,12.36 118.65,12.56 | 118.65,12.56 118.65,13.42 R37.1 | U14.7 121.82,13.63 120.75,12.56 118.65,12.56 | 67.16,4.32 67.17,4.32 67.55,4.65 115.75,4.65 v116.35,5.25
  Bottom 0.254: 116.84,10.44 v116.85,10.7
  Bottom 0.305: v116.35,5.25 116.35,10.1 v116.85,10.7
M7  (via drill 0.35, 0.4)
  Top 0.254: v137.55,10.6 138.9,10.6 C75.1 | 76.76,4.06 72.11,4.06 70.56,2.56 R65.2
  Top 0.305: C75.1 138.74,11.87 139.26,12.34 139.26,12.54 | 139.26,12.54 139.26,13.4 R39.1 | U16.7 142.43,13.61 141.36,12.54 139.26,12.54 | 76.76,4.06 136.26,4.06 v137.6,5.45
  Bottom 0.254: 137.54,10.44 v137.55,10.6
  Bottom 0.305: v137.6,5.45 137.6,10.5 v137.55,10.6
M8  (via drill 0.4, 0.43)
  Top 0.254: R66.2 74.3,2.02 | v157.28,10.54 158.87,10.54 C76.1
  Top 0.305: C76.1 158.65,11.55 159.27,12.32 159.27,12.52 | 159.27,12.52 159.27,13.38 R41.1 | U17.7 162.44,13.59 161.37,12.52 159.27,12.52 | 74.3,2.02 75.82,2.02 76.5,2.65 154.5,2.75 v156.95,5.2
  Bottom 0.305: v156.95,5.2 156.95,9.76 v157.28,10.54
MGND  (via drill 0.3, 0.4, 0.43)
  Top 0.25: 107.22,23.12 v107.4,23.15 | 127.37,23.07 v127.35,23.1 | 167.78,23.12 v167.6,23.3 | SJ2.1 43.9,22.75 v44,22.9 | SJ3.1 64.4,22.2 v63.8,22.9 | SJ4.1 84.2,22.7 v84.1,22.9 | SJ8.1 165.1,22 v164.6,22.6 | SJ5.1 v144.3,22.8 | SJ7.1 124,22.5 v124.4,22.9 | SJ6.1 103.7,22.5 v104.1,22.8
  Top 0.254: 46.73,23.02 v46.7,22.95
  Top 0.305: SJ1.2 23.85,22.8 v23.9,22.9
  Top 0.406: C14.C 48.6,20.36 C23.2 | v67.15,23.1 68.05,22.2 C16.C 68.6,20.84 C24.2 | C25.2 89.44,20.66 89.1,21 89.04,22.29 C12.C 88.35,23 v87.45,23 | 107.22,23.12 107.98,23.12 C17.C 108.9,20.44 C20.2 | 127.37,23.07 128.28,23.07 C15.C 129.1,20.11 C21.2 | v147.25,23.1 148.1,22.25 C18.C 149.45,20.14 C22.2 | 167.78,23.12 169.13,23.12 C13.C 169.59,22.66 169.6,20.9 169.99,20.51 C19.2
  Top 0.61: C14.C 47.4,22.25 v46.7,22.95 | v27.1,23.05 28.1,23.05 C11.C 28.79,21.94 C26.2
  Bottom 0.25: 88.2,23.2 87.1,23.2 86.03,23.2 M4.- | 68.3,23.1 v67.15,23.1 66.13,23.1 M3.- | v107.4,23.15 106.03,23.2 M5.- | v127.35,23.1 126.13,23.2 M6.- | v147.25,23.1 146.13,23.1 M7.- | v167.6,23.3 165.93,23.3 M8.- | 75.4,23.4 77.1,23.4 77.4,23.1 79.6,23.1 80,22.8 82.8,22.6 v84.1,22.9 84.8,22.8 85,23 | v44,22.9 44,22.8 | v63.8,22.9 63.6,22.8 | v164.6,22.6 164.4,22.6 164.2,22.4 | v144.3,22.8 144.1,22.7 144,22.8 | v124.4,22.9 124.1,22.8 124,22.9 | v104.1,22.8 104,22.8
  Bottom 0.254: M2.- 45.8,24.23 46.83,23.2 v46.7,22.95 | M1.- 25,24.2
  Bottom 0.305: v23.9,22.9 23.6,22.9 23.5,22.8
  Bottom 0.406: v67.15,23.1 67,23 | 87.1,23.2 87.25,23.2 v87.45,23 | J1.13 12.47,21.57 12.9,22
  Bottom 0.5: 75.22,23.58 75.4,23.4 69.98,23.4 69.7,23.12 | M4.- 85,23 | 89.58,23 89.7,23.12
  Bottom 0.61: 25,24.2 25,23.25 25.25,23 26.75,23 v27.1,23.05
  pour Bottom: 11,25 11,21.5 174.85,21.85 174.85,25.25
MIC4
  Top 0.25: M4.+ 85,22.8
  Top 0.254: 85,22.8 85,22.65 88.55,19.1 88.55,18.95 88.8,18.7 89.38,18.7 R8.1
  Top 0.305: C36.P 90.55,16.35 89.5,17.4 89.5,18.58 R8.1
MISO
  Top 0.254: U18.13 31.37,3.88 30.05,5.2 27.5,5.2 26.9,5.8 13.9,5.8 13.3,6.4 11.25,6.4 J1.2
MOSI
  Top 0.254: U18.14 31.2,3.25 29.75,4.7 27.2,4.7 26.6,5.3 12.74,5.3 J1.1
N$1
  Top 0.25: 27.1,20.5 25,22.6 25,23.13
  Top 0.254: 27.1,20.5 27.1,19.55 28.05,18.6 28.71,18.6 R17.1
  Top 0.305: 28.72,18.67 R17.1 | 28.71,18.6 28.71,17.18 C39.P
  Top 0.406: M1.+ 25,23.13 | 28.65,18.68 R17.1
N$2
  Top 0.305: U10.2 29.23,13.67 C39.M 27.94,11.54 C62.2 27.48,11.81 R42.2
N$3
  Top 0.25: 45,22.5 M2.+
  Top 0.254: 45,22.5 47.9,19.7 47.9,19.15 48.4,18.65 R4.1
  Top 0.305: C40.P 49.85,16.65 48.95,17.7 48.95,18.55 R4.1
N$4
  Top 0.254: 50.4,18.58 R4.2
  Top 0.406: 50.42,18.7 R2.1 51.6,18.69 | 50.42,18.7 R4.2 | 50.42,18.7 50.42,19.84 C23.1 50.55,20.25 51.4,21.1 C14.A
N$5
  Top 0.305: U11.2 50.85,13.7 C40.M 49.89,11.14 C66.2 49.27,11.57 R55.2
N$6
  Top 0.305: U10.1 25.02,13.02 24.6,12.6 24.6,11.31 R43.2 24.63,10.97 24.95,10.65 25.64,10.65 R42.1 26.11,10.29 26.7,9.7 27.69,9.7 C62.1
N$7
  Top 0.406: C11.A 31.2,22.55 31.2,21.4 31.21,20.9 C26.1 R17.2 30.64,18.7 R16.1
N$8
  Top 0.406: R10.1 70.81,18.6 R6.2 70.88,20.12 C24.1 70.61,20.26 71.5,21.15 71.5,22.1 C16.A
N$9
  Top 0.254: R43.1 22.63,11.07 22.5,11.2 21,11.2 21,10.7 C61.2
  Top 0.305: R43.1 23.04,11.24 23.2,11.5 23.2,16.14 R18.2
N$10
  Top 0.305: C28.2 21.78,18.97 22.05,18.7 R18.1 21.9,17.3 21.9,14.97 U10.5
N$11
  Top 0.406: C17.A 111.7,21.85 110.8,20.95 110.8,20.29 C20.1 110.81,19.06 R5.2 111.64,18.65 R3.1
N$12
  Top 0.254: 18.45,15.24 18.78,15.5 20.1,15.5 20.8,16.2
  Top 0.305: R33.2 18.45,15.24 | 20.8,16.2 20.8,16.75 C50.2
N$13
  Top 0.305: 19.71,14.67 R33.1 | U10.6 20.93,14.32 20.5,14.75 R33.1 | R40.2 19.74,14.73 R33.1
N$14
  Top 0.305: U11.1 47.2,13.05 46.05,11.9 46.05,11.41 R44.2 45.92,11.13 46.95,10.1 47.52,10.1 R55.1 47.8,10.05 48.5,9.7 C66.1
N$15
  Top 0.305: R19.2 44.31,16.17 44.31,11.37 R44.1 44.23,11.45 42.45,11.45 42.02,11.88 C60.2
N$16
  Top 0.305: C27.2 42.16,19.03 42.61,19.03 43.41,18.13 R19.1 43.47,18.09 43.01,17.63 43.01,15.12 U11.5
N$17
  Top 0.305: 42.03,16.72 42.03,16.48 41.6,16.05 39.35,16.05 39.15,15.85 39.15,15.27 R26.2
  Top 0.406: C43.2 42.03,16.72
N$18
  Top 0.305: R26.1 R34.2 40.81,13.9 41.25,13.9 41.7,14.35 U11.6
N$19
  Top 0.25: M3.+ 64.27,23.9 64.27,23.63 67.6,20.3
  Top 0.254: 67.6,20.3 67.6,19.7 68.65,18.65 69.34,18.65 R6.1
  Top 0.305: C37.P 70.3,16.35 69.3,17.35 69.3,18.57 R6.1
N$20
  Top 0.406: R11.1 91,18.6 | 91,18.6 R8.2 | 91,18.6 91,19.91 C25.1 90.7,19.95 91.7,20.95 91.7,22.15 C12.A
N$21
  Top 0.254: 68.79,11.48 C67.2
  Top 0.305: U13.2 70.22,13.63 C37.M 68.79,11.64 68.79,11.48 | R54.2 68.81,11.48 C67.2
N$23
  Top 0.254: 64.32,10.9 R47.2 64.91,11.49 | 66.89,9.91 R54.1 66.44,9.96 64.91,11.49 | U13.1 65.98,12.98 65.3,12.3 65.3,11.88 64.91,11.49
  Top 0.305: 66.89,9.91 67.94,9.91 68.35,9.5 69.01,9.5 C67.1
N$24
  Top 0.254: R47.1 61.62,10.86 61.62,10.66 C72.2
  Top 0.305: R47.1 62.76,11.2 63.82,12.26 63.82,16.1 R21.2
N$25
  Top 0.305: C30.2 61.67,18.96 62.12,18.86 62.82,18.06 R21.1 62.98,18.02 62.52,17.56 62.52,15.05 U13.5
N$26
  Top 0.305: R28.2 58.69,15.43 58.92,15.61 61.22,15.61 61.42,15.86 61.42,16.71 C45.2
N$27
  Top 0.305: U13.6 60.78,14.28 | 60.78,14.28 R28.1 | R36.2 60.28,13.78 60.78,14.28
N$28
  Top 0.406: R12.1 130.84,18.6 R7.2 C21.1 130.75,20 131.9,21.15 C15.A
N$29
  Top 0.406: C18.A 152.25,21.14 C22.1 151.41,19.22 R9.2 151.38,18.6 R13.1
N$30
  Top 0.305: R52.2 88.8,11.59 C64.2 90.65,12.74 C36.M 90.39,13.61 U15.2
N$31
  Top 0.406: C13.A 172.3,21.24 171.5,20.45 C19.1 171.51,19.01 R15.2 172.28,18.59 R14.1
N$32
  Top 0.254: R50.2 85.2,10.84 | 85.2,10.84 85.36,10.84 86.1,10.1 86.93,10.1 R52.1 87.12,9.91 | U15.1 86.26,12.96 85.2,11.9 85.2,10.84
  Top 0.305: 87.12,9.91 87.84,9.91 88.15,9.6 89.01,9.6 C64.1
N$33
  Top 0.254: R50.1 81.63,10.84 81.63,10.64 C74.2
  Top 0.305: R50.1 82.77,11.18 83.83,12.24 83.83,16.08 R23.2
N$34
  Top 0.305: C31.2 81.68,18.94 82.13,18.94 83.03,18.04 R23.1 82.99,18 82.53,17.54 82.53,15.03 U15.5
N$35
  Top 0.305: R30.2 78.69,15.4 78.93,15.59 81.23,15.59 81.43,15.84 81.43,16.69 C47.2
N$36
  Top 0.305: U15.6 80.8,14.26 | 80.8,14.26 R30.1 | R38.2 80.29,13.76 80.8,14.26
N$39
  Top 0.305: R57.2 108.64,11.4 | 108.64,11.4 C69.2 | 108.64,11.4 108.75,11.4 110.12,12.78 | 110.12,12.78 C35.M | U12.2 109.25,13.65 110.12,12.78
N$41
  Top 0.305: R57.1 106.32,9.88 105.3,10.9 | 105.3,10.9 104.22,10.9 R45.2 | U12.1 105.8,13 105.3,12.5 105.3,10.9 | C69.1 108.61,9.81 | 108.61,9.81 108.6,9.8 | 106.6,9.8 R57.1 | 108.61,9.81 106.74,9.81 R57.1
N$42
  Top 0.254: R45.1 102.5,11.05 102.33,10.88 101.54,10.88 101.54,10.68 C71.2
  Top 0.305: R45.1 102.68,11.22 103.9,12.44 103.9,16 103.78,16.12 103.44,16.47 R20.2
N$43
  Top 0.305: C29.2 101.24,18.98 101.54,18.98 102.49,18.03 102.5,18.05 102.5,18.04 R20.1 102.85,17.99 102.44,17.58 102.44,15.07 U12.5
N$44
  Top 0.305: R27.2 98.61,15.45 98.84,15.63 101.14,15.63 101.34,15.88 101.34,16.73 C44.2
N$45
  Top 0.305: U12.6 100.7,14.3 | 100.7,14.3 R27.1 | R35.2 100.2,13.8 100.7,14.3
N$46
  Top 0.25: 125.3,21.8 125.3,24.03 M6.+ 124.27,23.8 123.57,23.9
  Top 0.254: R7.1 128.47,18.63 125.3,21.8
  Top 0.305: R7.1 129.29,17.21 130.2,16.3 130.55,16.3 C38.P
N$48
  Top 0.305: R56.2 128.43,11.41 C70.2 130.7,12.84 C38.M 130.22,13.63 U14.2
N$50
  Top 0.305: U14.1 125.88,12.98 125.2,12.3 125.2,11 125.1,10.9 | 125.1,10.9 124.25,10.9 R48.2 | 125.1,10.9 126.11,9.89 R56.1 127.17,9.56 C70.1
N$51
  Top 0.254: R48.1 121.55,10.86 121.55,10.66 C73.2
  Top 0.305: R48.1 122.69,11.2 123.75,12.26 123.75,16.1 R22.2
N$52
  Top 0.305: C34.2 121.6,18.96 122.15,18.96 122.85,18.16 R22.1 122.91,18.02 122.45,17.56 122.45,15.05 U14.5
N$53
  Top 0.305: R29.2 118.61,15.43 118.85,15.61 121.15,15.61 121.35,15.86 121.35,16.71 C46.2
N$54
  Top 0.305: U14.6 120.72,14.28 | 120.72,14.28 R29.1 | R37.2 120.21,13.78 120.72,14.28
N$55
  Top 0.25: 143.57,23.9 M7.+ 145.2,24.03 145.2,22.1
  Top 0.254: 145.2,22.1 145.2,21.95 147.3,19.85 148,19.85 149.3,18.55 149.84,18.55 R9.1 | 149.89,18.51 149.89,17.86
  Top 0.305: 149.89,18.51 R9.1 150,18.51 150,17.05 151.15,15.9 C41.P
N$57
  Top 0.305: R49.2 147.43,11.79 148.85,11.79 C65.2 149.65,11.3 C41.M 150.34,13.61 U16.2
N$59
  Top 0.305: 146,10.9 146.8,10.1 R49.1 147.85,10.1 148.6,9.35 149.51,9.35 C65.1 | 146,10.9 144.88,10.9 R51.2 | U16.1 146.46,12.96 146.1,12.6 146.1,11 146,10.9
N$60
  Top 0.254: R51.1 142.16,10.84 142.16,10.64 C75.2
  Top 0.305: R51.1 143.3,11.18 144.36,12.24 144.36,16.08 R24.2
N$61
  Top 0.305: C32.2 142.21,18.94 142.56,18.54 143.36,18.54 R24.1 143.52,18 143.06,17.54 143.06,15.03 U16.5
N$62
  Top 0.305: R31.2 139.22,15.4 139.46,15.59 141.36,15.59 141.66,15.84 141.66,16.69 C48.2
N$63
  Top 0.305: U16.6 141.32,14.26 | 141.32,14.26 R31.1 | R39.2 140.82,13.76 141.32,14.26
N$64
  Top 0.25: M8.+ 164.59,23.82 168.27,20.13
  Top 0.254: 168.27,20.13 168.7,19.7 168.7,19.2 169.3,18.6 R15.1
  Top 0.305: R15.1 170.01,17.14 C42.P
N$66
  Top 0.305: R46.2 169.21,11.63 C68.2 169.74,11.63 169.74,11.79 C42.M 170.56,13.59 U17.2
N$68
  Top 0.305: U17.1 166.94,12.94 166.1,12.1 166.1,11.3 165.8,11 | 165.8,11 165.01,11 R53.2 | 165.8,11 166.69,10.11 R46.1 168.83,10.16 C68.1
N$69
  Top 0.254: R53.1 162.17,10.82 162.17,10.62 C76.2
  Top 0.305: R53.1 163.31,11.16 164.37,12.22 164.37,16.06 R25.2
N$70
  Top 0.305: C33.2 162.22,18.92 163.47,18.92 163.87,18.52 R25.1 163.53,17.98 163.07,17.52 163.07,15.01 U17.5
N$71
  Top 0.305: R32.2 159.24,15.38 159.47,15.57 161.77,15.57 161.97,15.82 161.97,16.67 C49.2
N$72
  Top 0.305: U17.6 161.34,14.24 | 161.34,14.24 R32.1 | R41.2 160.83,13.74 161.34,14.24
N$75  (via drill 0.3)
  Top 0.25: 19.1,25.4 19.4,25.2 19.4,22.41 v19.43,22.3 | 38.88,26.22 38.22,26.22 37.8,25.8 37.8,25.3 36,23.4 36,23.27 v35.13,22.34
  Top 0.254: 38.88,26.22 U2.2 | U19.1 18.43,25.48 18.5,25.4 19.1,25.4
  Bottom 0.25: 32.7,22.69 34.79,22.69 v35.13,22.34
  Bottom 0.254: v19.43,22.3 19.5,22.2 19.4,22.1 32.06,22.1 32.7,22.69
N$76  (via drill 0.3)
  Top 0.25: U3.2 58.2,26.2 57.5,25.5 57.5,24.2 55.7,22.4 v55.1,22.4 | U2.1 39.1,25.4 39.4,24.9 39.4,23.4 38.8,22.8 v38.8,22.3
  Bottom 0.25: v55.1,22.4 54.8,22.7 52.8,22.7 52.1,22.1 39.1,22.1 v38.8,22.3
N$77  (via drill 0.3)
  Top 0.25: U3.1 58.9,25.3 59,25.3 59.4,25 59.4,22.9 59,22.5 v59,22.2 | v75.6,22.4 75.9,22.4 77.6,24.1 77.6,25.8 78,26.2 U4.2
  Bottom 0.25: v59,22.2 59.3,22.3 59.5,22.1 72.5,22.1 73.1,22.7 75.2,22.7 v75.6,22.4
N$78  (via drill 0.3)  (1 unrouted)
  Top 0.25: 79.4,25.1 79.4,22.6 v79.3,22.3 | v95.7,22.3 97.6,24.15 97.6,25.8 98,26.2 U5.2
  Bottom 0.25: v79.3,22.3 79.4,22.1 92.6,22.1 93.1,22.6 95.4,22.6 v95.7,22.3
N$79  (via drill 0.3)
  Top 0.25: U5.1 99.15,25.25 99.4,25.1 v99.4,22.3 | v116,22.4 117.6,24.2 117.6,25.6 118.2,26.2 U6.2
  Bottom 0.25: v99.4,22.3 99.8,22.3 100,22.1 113,22.1 113.6,22.7 115.6,22.7 v116,22.4
N$80  (via drill 0.3)
  Top 0.25: U6.1 119.1,25.3 119.4,25 119.4,22.9 119.1,22.6 v119.1,22.3 | v136.5,22.3 137.7,23.5 137.7,25.7 138.2,26.2 U7.2
  Bottom 0.25: v119.1,22.3 118.9,22.1 133.4,22.1 134,22.7 136.1,22.7 v136.5,22.3 136.6,22.3
N$81  (via drill 0.3)
  Top 0.25: U7.1 139.15,25.45 139.4,25 139.4,22.9 139.2,22.6 v139.2,22.3 | v156.3,22 157.6,23.3 157.6,25.5 158.3,26.2 U8.2
  Bottom 0.25: v139.2,22.3 139.5,22.1 153,22.1 153.6,22.7 155.6,22.7 v156.3,22
N$84
  Top 0.406: C10.1 10.64,26.51 11.15,26 11.5,26 U9.4
N$90
  Top 0.25: M5.+ 104.64,23.86 105,23.5
  Top 0.254: 105,23.5 105,23.25 107.05,21.2 107.05,20.15 108.45,18.75 109.18,18.75 R5.1
  Top 0.305: R5.1 109.28,17.37 C35.P
OUT1
  Top 0.254: 40.82,6.62 C89.1 | C89.1 40.87,6.63 40.65,6.85 39.55,6.85 39.02,6.42 U18.8 | R58.1 42.61,5.69 42.35,5.95 41.7,5.95 C89.1
OUT2
  Top 0.254: 37.87,5.71 U18.7 39.16,5.79 40.48,4.47 43.02,4.47 44.75,6.3 45.61,6.3 C90.1 45.59,6.12 46.2,5.5 46.52,5.5 R59.1
OUT3
  Top 0.254: C91.1 R60.1 49.27,4.11 49.09,4.01 40.19,4.01 39.1,5.1 37.85,5.1 U18.6
OUT4  (1 unrouted)
  Top 0.254: 37.8,4.49 37.85,4.45 | C92.1 R61.1 53.11,3.45 40.05,3.45 39,4.5 37.82,4.5 U18.5
OUT5
  Top 0.254: C93.1 R62.1 57.68,2.99 39.76,2.99 38.87,3.88 U18.4
OUT6
  Top 0.254: U18.3 37.8,3.22 37.85,3.17 38.81,3.17 39.45,2.54 62.73,2.54 R63.1 C94.1
OUT7
  Top 0.254: U18.2 37.81,2.6 38.6,2.6 39.12,2.08 67.38,2.08 67.81,2.51 R65.1 C95.1
OUT8
  Top 0.254: C96.1 R66.1 72.54,1.97 71.99,1.62 38.83,1.62 38.47,1.98 U18.1
TEN
  Top 0.305: J1.7 12.4,12.7 11.1,11.4 8.5,11.4 7.7,12.2 7.7,24.1 | 7.7,24.1 7.7,25 7.35,25.35 7.35,26.85 R1.2 | U9.3 12.1,23.45 11.5,24.1 7.7,24.1
TMI
  Top 0.25: 18,26.2 17.6,25.8 17.6,24.15 17.8,23.95 17.8,21.1
  Top 0.254: 15.8,19.1 15.8,14.9 15.5,14.6 14.3,14.6 13.6,13.9 13.6,11.29 J1.5 | 18,26.2 U19.2
  Top 0.305: 15.8,19.1 17.8,21.1
TMO  (via drill 0.3)
  Top 0.25: U8.1 159.15,25.25 159.3,25.1 v159.3,21.8
  Bottom 0.25: v159.3,21.8 159.6,21.8 159.8,21.6 174.7,21.6 174.75,21.6 | 9.67,9.9 J1.6
  Bottom 0.254: 174.7,21.6 174.8,21.6 175.9,20.5 175.9,3.4 173.2,0.7 10.8,0.7 7.9,3.6 7.9,8.13 J1.6
VADC
  Top 0.305: 29.54,3.7 C98.1
  Top 0.406: 26.99,3.6 R64.1 | 29.54,3.7 27.1,3.7 C97.1 | U18.16 31.62,1.98 29.94,3.66 C98.1
  Top 0.5: 26.99,3.6 C97.1

## Text on the board
tPlace: A | F | G | H | B | C | D | E | +9 | MG | G | DG | VA | +5 | TE | TO | TI | S | C | O | I | 8MIC_XIMPEDANCE | J007901C | 20200610 | S | S